# Altium PCB turnRacingMain.PcbDoc (part 1 of 2)
Units mil, origin at the board's own origin, x right, y up, seen from the top; angles counter-clockwise.
Board outline 9596.84 x 4626.79 mil, 2 copper layers (Component Side, Bottom Layer), stack 12.8 mil thick; 110 components, 131 nets, 424 pads, 166 vias.
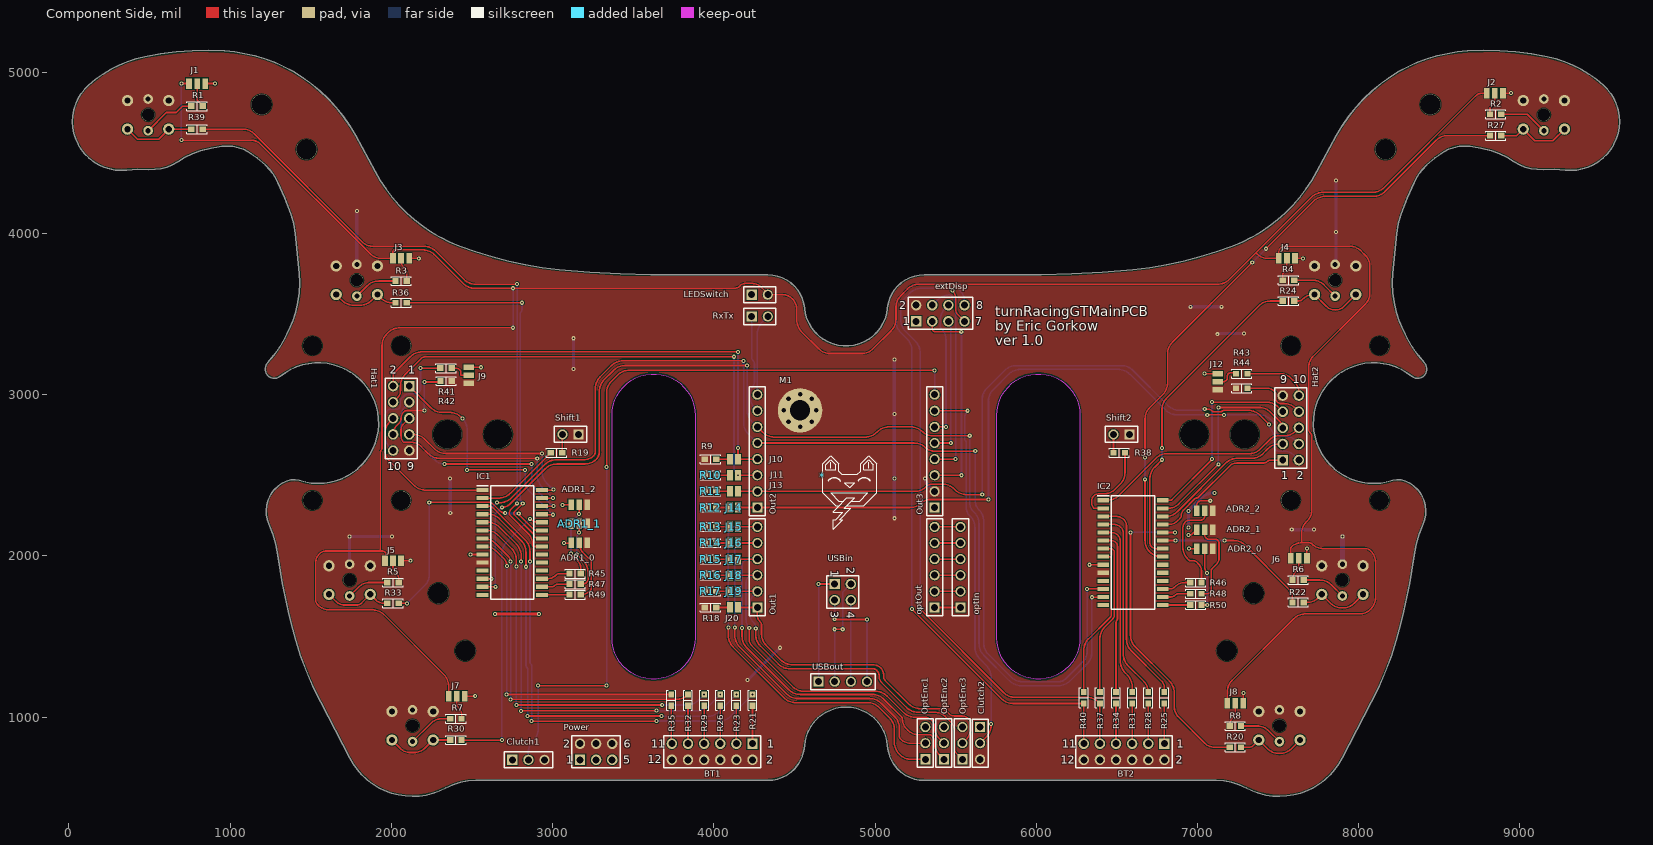
[diagram p0: Component Side view]
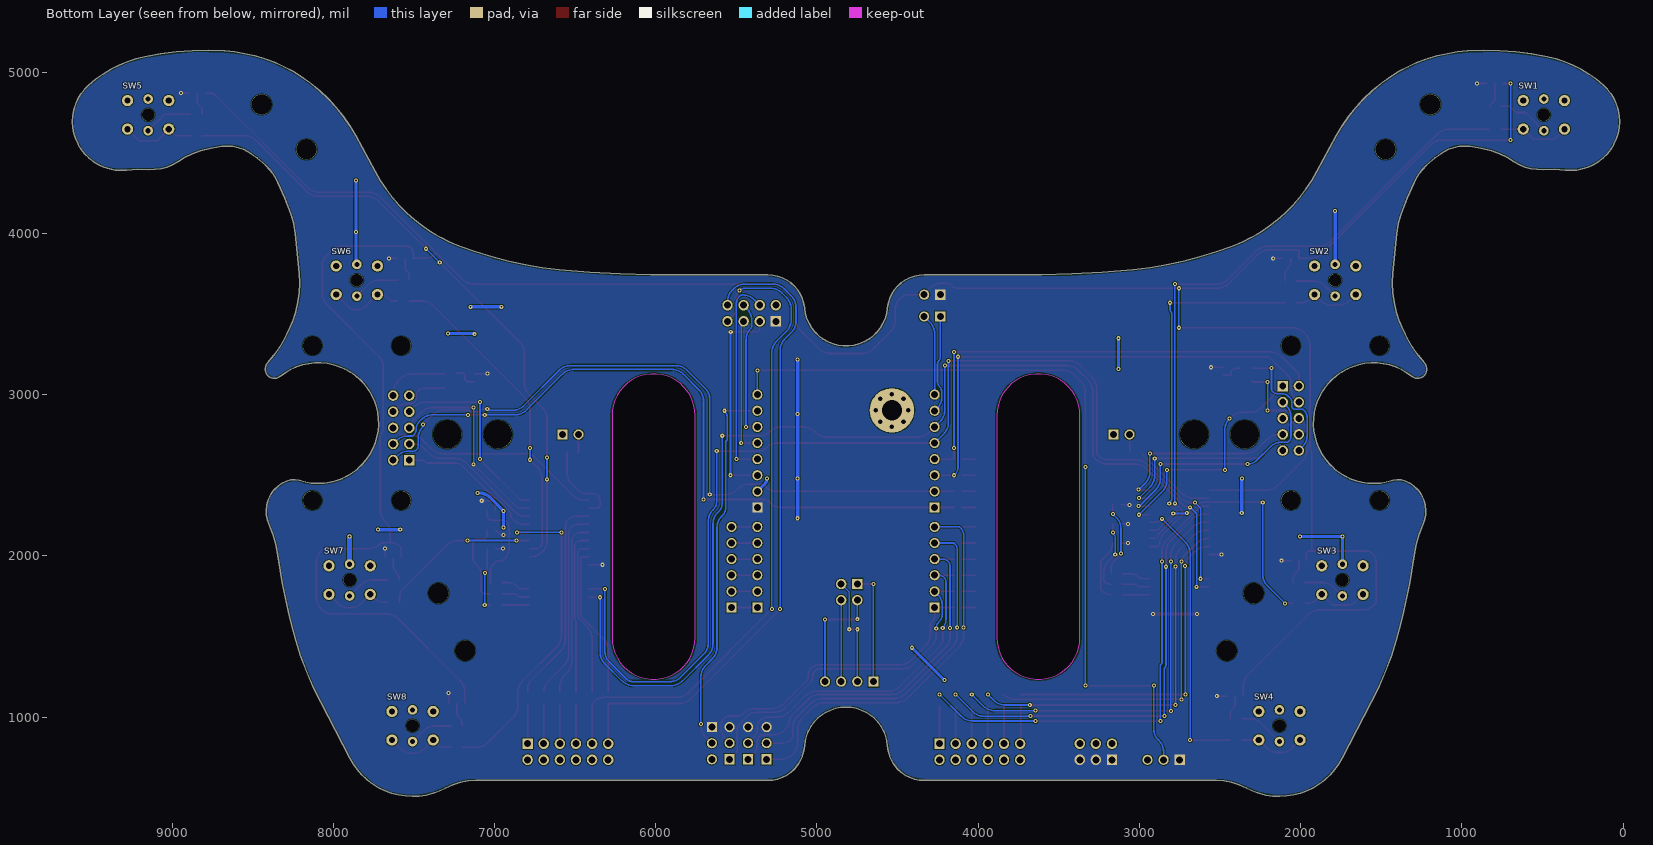
[diagram p1: Bottom Layer view, seen from below]
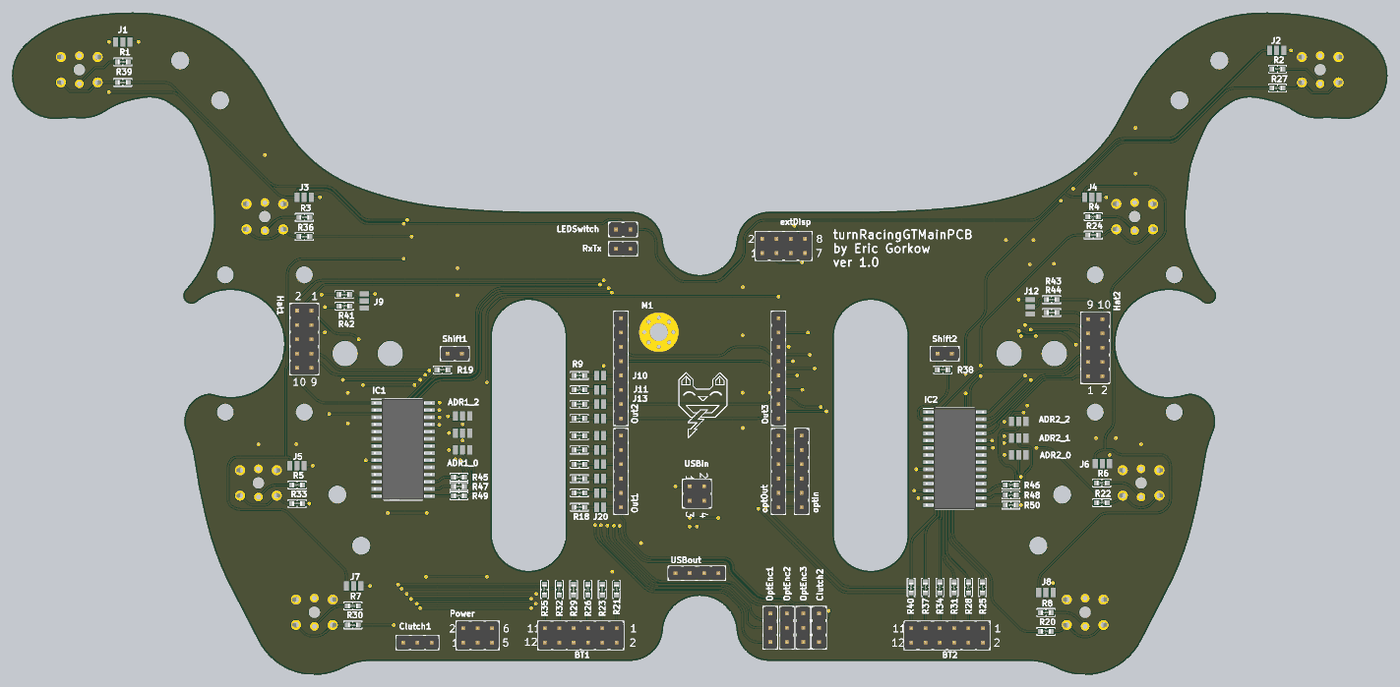
[diagram p3: 3D render of the assembled board from above, using the file's embedded part models]
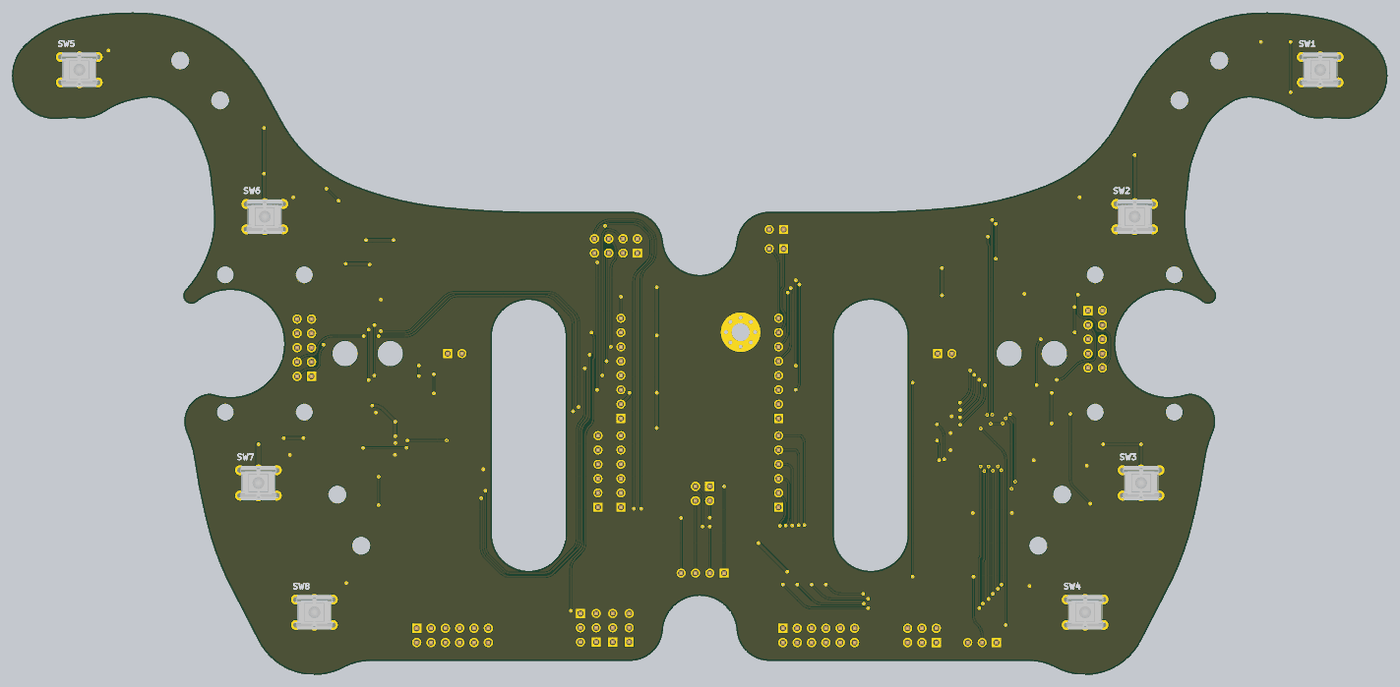
[diagram p4: 3D render of the assembled board from below, using the file's embedded part models]

## Layer stack, top to bottom
Top Solder: solder mask 0.4, Solder Resist, Dk 3.5
Component Side: signal copper 1.4
Dielectric 1: core 10, FR-4, Dk 4.2
Bottom Layer: signal copper 1.4
Solder Side: solder mask 0.4, Solder Resist, Dk 3.5

## Board outline
508 vertices, not listed, extent 21.58,508.43 9618.42,5135.22
cut-out: 3368.79,2870.69 3370.82,2903.01 3376.89,2934.82 3386.89,2965.62 3400.68,2994.92 3418.03,3022.26 3438.68,3047.22 3462.28,3069.38 3488.48,3088.42 3516.86,3104.02 3546.97,3115.94 3578.34,3123.99 3610.47,3128.05 3642.85,3128.05 3674.98,3123.99 3706.35,3115.94 3736.46,3104.02 3764.83,3088.42 3791.03,3069.38 3814.64,3047.22 3835.28,3022.26 3852.64,2994.92 3866.42,2965.62 3876.43,2934.82 3882.5,2903.01 3884.53,2870.69 3884.53,1492.74 3882.5,1460.42 3876.43,1428.61 3866.42,1397.81 3852.64,1368.5 3835.28,1341.16 3814.64,1316.21 3791.03,1294.04 3764.83,1275.01 3736.46,1259.4 3706.35,1247.48 3674.98,1239.43 3642.85,1235.37 3610.47,1235.37 3578.34,1239.43 3546.97,1247.48 3516.86,1259.4 3488.48,1275.01 3462.28,1294.04 3438.68,1316.21 3418.03,1341.16 3400.68,1368.5 3386.89,1397.81 3376.89,1428.61 3370.82,1460.42 3368.79,1492.74
cut-out: 6271.22,1492.74 6269.18,1460.42 6263.12,1428.61 6253.11,1397.81 6239.32,1368.5 6221.97,1341.16 6201.33,1316.21 6177.72,1294.04 6151.52,1275.01 6123.14,1259.4 6093.03,1247.48 6061.66,1239.43 6029.54,1235.37 5997.15,1235.37 5965.02,1239.43 5933.66,1247.48 5903.55,1259.4 5875.17,1275.01 5848.97,1294.04 5825.36,1316.21 5804.72,1341.16 5787.37,1368.5 5773.58,1397.81 5763.57,1428.61 5757.5,1460.42 5755.47,1492.74 5755.47,2870.69 5757.5,2903.01 5763.57,2934.82 5773.58,2965.62 5787.37,2994.92 5804.72,3022.26 5825.36,3047.22 5848.97,3069.38 5875.17,3088.42 5903.55,3104.02 5933.66,3115.94 5965.02,3123.99 5997.15,3128.05 6029.54,3128.05 6061.66,3123.99 6093.03,3115.94 6123.14,3104.02 6151.52,3088.42 6177.72,3069.38 6201.33,3047.22 6221.97,3022.26 6239.32,2994.92 6253.11,2965.62 6263.12,2934.82 6269.18,2903.01 6271.22,2870.69

## Design rules (kind name [scope] priority, off if disabled: settings)
AcuteAngle [All] p1: minimum=4.50000000000000E+0001 checktracksonly=FALSE
BoardOutlineClearance [All] p1: gap=10 ignorepadtopadclearanceinfootprint=FALSE
Clearance [All] p1: gap=5 ignorepadtopadclearanceinfootprint=FALSE
ComponentClearance [All] p1: gap=3.94 collisioncheckmode=3 verticalgap=10 showdistances=FALSE
DiffPairsRouting [All] p1: maxlimit=10 minlimit=3.94 mostfreqgap=10 toplayer_minwidth=11.81 toplayer_maxwidth=15 toplayer_prefwidth=15 bottomlayer_minwidth=11.81 bottomlayer_maxwidth=15 bottomlayer_prefwidth=15 maxuncoupledlength=500
FanoutControl Fanout_Small [All] p1 off: bgadir=Out bgaviamode=Centered fanoutstyle=Auto fanoutdirection=Alternating viagrid=1 // Protel DXP Scope 1 Expression Was: (CompPinCount < 5)   Fanout_Small (Default Rule)
FanoutControl Fanout_Default [All] p2: bgadir=Out bgaviamode=Centered fanoutstyle=Auto fanoutdirection=Alternating viagrid=1 // Fanout_Default (Default Rule)
FanoutControl Fanout_SOIC [All] p3 off: bgadir=Out bgaviamode=Centered fanoutstyle=Auto fanoutdirection=Alternating viagrid=1 // Protel DXP Scope 1 Expression Was: IsSOIC   Fanout_SOIC (Default Rule)
FanoutControl Fanout_BGA [All] p4 off: bgadir=Out bgaviamode=Centered fanoutstyle=Auto fanoutdirection=Alternating viagrid=1 // Protel DXP Scope 1 Expression Was: IsBGA   Fanout_BGA (Default Rule)
FanoutControl Fanout_LCC [All] p5 off: bgadir=Out bgaviamode=Centered fanoutstyle=Auto fanoutdirection=Alternating viagrid=1 // Protel DXP Scope 1 Expression Was: IsLCC   Fanout_LCC (Default Rule)
HoleSize [All] p1: absolutevalues=TRUE maxlimit=275.59 minlimit=7.87 maxpercent=80.000 minpercent=20.000
MinimumAnnularRing [All] p1: minimumring=2.99
MinimumSolderMaskSliver [All] p1: minsoldermaskwidth=7.87
PolygonConnect [All] p1: connectstyle=Direct reliefconductorwidth=10 reliefentries=4 polygonreliefangle="90 Angle" airgapwidth=10
RoutingVias [All] p1: holewidth=11.81 width=25.2 viastyle="Through Hole" minholewidth=11.81 minwidth=24 maxholewidth=28 maxwidth=50
SMDEntry [All] p1 off: side=TRUE corner=TRUE anyangle=FALSE // Protel DXP Scope 1 Expression Was: not IsRoundPad
SMDToCorner [All] p1: distance=60000
SilkToSolderMaskClearance [All] p1 off: minsilkscreentomaskgap=10 clearancetoexposedcopper=TRUE // Protel DXP Scope 1 Expression Was: IsPad
SolderMaskExpansion ViaTenting [IsVia] p1: expansion=-393.7
SolderMaskExpansion [All] p2: expansion=0
Width [All] p1: maxlimit=118.11 minlimit=6 preferedwidth=12
20 further rules are at their usual default settings.

## Classes and differential pairs
component class turnRacingMainInput: BT1 BT2 Clutch1 Clutch2 Hat1 Hat2 J1 J2 J3 J4 J5 J6 J7 J8 J9 J10 J11 J12 J13 J14 J15 J16 J17 J18 J19 J20 OptEnc1 OptEnc2 OptEnc3 R1 R2 R3 R4 R5 R6 R7 R8 R9 R10 R11 R12 R13 R14 R15 R16 R17 R18 R41 R42 R43 R44 Shift1 Shift2 SW1 SW2 SW3 SW4 SW5 SW6 SW7 SW8
component class turnRacingMain: * ADR1_0 ADR1_1 ADR1_2 ADR2_0 ADR2_1 ADR2_2 extDisp F1 IC1 IC2 LEDSwitch M1 optIn optOut Out1 Out2 Out3 Power R19 R20 R21 R22 R23 R24 R25 R26 R27 R28 R29 R30 R31 R32 R33 R34 R35 R36 R37 R38 R39 R40 R45 R46 R47 R48 R49 R50 RxTx USBin USBout Y1

## Components (designator, comment, footprint, x,y, rotation, side; value= is the part's Value field where it differs from the comment)
* "Signature" Signature 4675,2490 r0 top
ADR1_0 "JUMPERID" SMD-JUMPER-3 3165,2080.63 r180 top net-tie
ADR1_1 "JUMPERID" SMD-JUMPER-3 3165,2198.51 r180 top net-tie
ADR1_2 "JUMPERID" SMD-JUMPER-3 3165,2316.4 r180 top net-tie
ADR2_0 "JUMPERID" SMD-JUMPER-3 7045,2045 r180 top net-tie
ADR2_1 "JUMPERID" SMD-JUMPER-3 7045,2162.88 r180 top net-tie
ADR2_2 "JUMPERID" SMD-JUMPER-3 7045,2280.77 r180 top net-tie
BT1 "61301221121" 61301221121 3990,785 r180 top locked
BT2 "61301221121" 61301221121 6545,785 r180 top
Clutch1 "61300311121" 61300311121 2850,735 r0 top
Clutch2 "61300311121" 61300311121 5652.12,837.99 r270 top
extDisp "61300821121" 61300821121 5405,3505 r0 top
Hat1 "61301021121" 61301021121 2060.89,2853.29 r270 top locked
Hat2 "61301021121" 61301021121 7579.11,2794.21 r90 top locked
IC1 "MCP23017-E_SO" SOIC127P1030X265-28N 2750,2083.19 r0 top
IC2 "MCP23017-E_SO" SOIC127P1030X265-28N 6600,2020 r0 top
J1 "JUMPERID" SMD-JUMPER-3 795,4930 r0 top net-tie
J2 "JUMPERID" SMD-JUMPER-3 8845,4870 r0 top net-tie
J3 "JUMPERID" SMD-JUMPER-3 2060,3845 r0 top net-tie
J4 "JUMPERID" SMD-JUMPER-3 7555,3845 r0 top net-tie
J5 "JUMPERID" SMD-JUMPER-3 2010,1970 r0 top net-tie
J6 "JUMPERID" SMD-JUMPER-3 7629.11,1985 r0 top net-tie
J7 "JUMPERID" SMD-JUMPER-3 2405,1130 r0 top net-tie
J8 "JUMPERID" SMD-JUMPER-3 7235,1085 r0 top net-tie
J9 "JUMPERID" SMD-JUMPER-3 2480,3120 r90 top net-tie
J10 "SMD Jumper open" SMD-JUMPER-OPEN 4125,2600 r180 top
J11 "SMD Jumper open" SMD-JUMPER-OPEN 4125,2500 r180 top
J12 "JUMPERID" SMD-JUMPER-3 7125,3080 r90 top net-tie
J13 "SMD Jumper open" SMD-JUMPER-OPEN 4125,2400 r180 top
J14 "SMD Jumper open" SMD-JUMPER-OPEN 4125,2300 r180 top
J15 "SMD Jumper open" SMD-JUMPER-OPEN 4125,2180 r180 top
J16 "SMD Jumper open" SMD-JUMPER-OPEN 4125,2080 r180 top
J17 "SMD Jumper open" SMD-JUMPER-OPEN 4125,1980 r180 top
J18 "SMD Jumper open" SMD-JUMPER-OPEN 4125,1880 r180 top
J19 "SMD Jumper open" SMD-JUMPER-OPEN 4125,1780 r180 top
J20 "SMD Jumper open" SMD-JUMPER-OPEN 4125,1680 r180 top
LEDSwitch "61300211121" 61300211121 4285,3620 r0 top
M1 "mounting pad" MOUNTING_PAD_M3 4535,2902.52 r0 top
OptEnc1 "61300311121" 61300311121 5312.12,838.21 r90 top
OptEnc2 "61300311121" 61300311121 5427.12,838.21 r90 top
OptEnc3 "61300311121" 61300311121 5542.12,838.21 r90 top
optIn "61300611121" 61300611121 5530,1930 r90 top
optOut "61300611121" 61300611121 5370,1930 r90 top
Out1 "61300611121" 61300611121 4270,1930 r90 top
Out2 "61300811121" 61300811121 4270,2650 r90 top
Out3 "61300811121" 61300811121 5370,2650 r90 top
Power "61300621121" 61300621121 3270,785 r0 top
R1 "SMD Resistor" "STACKPOLE CSR0603" 795,4790 r180 top value=330
R2 "SMD Resistor" "STACKPOLE CSR0603" 8850,4740 r0 top value=330
R3 "SMD Resistor" "STACKPOLE CSR0603" 2060.89,3705 r180 top value=330
R4 "SMD Resistor" "STACKPOLE CSR0603" 7565,3710 r0 top value=330
R5 "SMD Resistor" "STACKPOLE CSR0603" 2010.89,1835 r180 top value=330
R6 "SMD Resistor" "STACKPOLE CSR0603" 7625,1850 r0 top value=330
R7 "SMD Resistor" "STACKPOLE CSR0603" 2400,990 r180 top value=330
R8 "SMD Resistor" "STACKPOLE CSR0603" 7235,945 r0 top value=330
R9 "SMD Resistor" "STACKPOLE CSR0603" 3980,2600 r180 top value=10k
R10 "SMD Resistor" "STACKPOLE CSR0603" 3980,2500 r180 top value=10k
R11 "SMD Resistor" "STACKPOLE CSR0603" 3980,2400 r180 top value=10k
R12 "SMD Resistor" "STACKPOLE CSR0603" 3980,2300 r180 top value=10k
R13 "SMD Resistor" "STACKPOLE CSR0603" 3980,2180 r180 top value=10k
R14 "SMD Resistor" "STACKPOLE CSR0603" 3980,2080 r180 top value=10k
R15 "SMD Resistor" "STACKPOLE CSR0603" 3980,1980 r180 top value=10k
R16 "SMD Resistor" "STACKPOLE CSR0603" 3980,1880 r180 top value=10k
R17 "SMD Resistor" "STACKPOLE CSR0603" 3980,1780 r180 top value=10k
R18 "SMD Resistor" "STACKPOLE CSR0603" 3980,1680 r180 top value=10k
R19 "SMD Resistor" "STACKPOLE CSR0603" 3025,2640 r0 top value=4k7
R20 "SMD Resistor" "STACKPOLE CSR0603" 7235,812.93 r180 top value=4k7
R21 "SMD Resistor" "STACKPOLE CSR0603" 4240,1105 r270 top locked value=4k7
R22 "SMD Resistor" "STACKPOLE CSR0603" 7625,1711.17 r180 top value=4k7
R23 "SMD Resistor" "STACKPOLE CSR0603" 4140,1105 r270 top locked value=4k7
R24 "SMD Resistor" "STACKPOLE CSR0603" 7565,3580.95 r180 top value=4k7
R25 "SMD Resistor" "STACKPOLE CSR0603" 6793.54,1120 r270 top value=4k7
R26 "SMD Resistor" "STACKPOLE CSR0603" 4040,1105 r270 top locked value=4k7
R27 "SMD Resistor" "STACKPOLE CSR0603" 8850,4607.06 r180 top value=4k7
R28 "SMD Resistor" "STACKPOLE CSR0603" 6695,1120 r270 top value=4k7
R29 "SMD Resistor" "STACKPOLE CSR0603" 3940,1105 r270 top locked value=4k7
R30 "SMD Resistor" "STACKPOLE CSR0603" 2400,857.93 r0 top value=4k7
R31 "SMD Resistor" "STACKPOLE CSR0603" 6595,1120 r270 top value=4k7
R32 "SMD Resistor" "STACKPOLE CSR0603" 3840,1105 r270 top value=4k7
R33 "SMD Resistor" "STACKPOLE CSR0603" 2010.89,1706.17 r0 top value=4k7
R34 "SMD Resistor" "STACKPOLE CSR0603" 6495,1120 r270 top value=4k7
R35 "SMD Resistor" "STACKPOLE CSR0603" 3736.46,1105 r270 top locked value=4k7
R36 "SMD Resistor" "STACKPOLE CSR0603" 2060.89,3570 r0 top value=4k7
R37 "SMD Resistor" "STACKPOLE CSR0603" 6395,1120 r270 top value=4k7
R38 "SMD Resistor" "STACKPOLE CSR0603" 6515,2640 r180 top locked value=4k7
R39 "SMD Resistor" "STACKPOLE CSR0603" 795,4647.06 r0 top value=4k7
R40 "SMD Resistor" "STACKPOLE CSR0603" 6295,1120 r270 top value=4k7
R41 "SMD Resistor" "STACKPOLE CSR0603" 2339.57,3165 r0 top value=4k7
R42 "SMD Resistor" "STACKPOLE CSR0603" 2340,3085 r180 top value=4k7
R43 "SMD Resistor" "STACKPOLE CSR0603" 7275,3130 r180 top value=4k7
R44 "SMD Resistor" "STACKPOLE CSR0603" 7275,3040 r0 top value=4k7
R45 "SMD Resistor" "STACKPOLE CSR0603" 3140,1890 r180 top value=4k7
R46 "SMD Resistor" "STACKPOLE CSR0603" 6990,1835 r180 top value=4k7
R47 "SMD Resistor" "STACKPOLE CSR0603" 3140,1825 r180 top value=4k7
R48 "SMD Resistor" "STACKPOLE CSR0603" 6990,1765 r180 top value=4k7
R49 "SMD Resistor" "STACKPOLE CSR0603" 3140,1760 r180 top value=4k7
R50 "SMD Resistor" "STACKPOLE CSR0603" 6990,1695 r180 top value=4k7
RxTx "61300211121" 61300211121 4285,3485 r0 top
Shift1 "61300211121" 61300211121 3111.03,2753.32 r180 top locked
Shift2 "61300211121" 61300211121 6528.97,2753.32 r180 top locked
SW1 "FSMIJ" FSMIJ 491.26,4735.65 r180 bottom locked
SW2 "FSMIJ" FSMIJ 1785.59,3709.54 r180 bottom locked
SW3 "FSMIJ" FSMIJ 1740.89,1849.75 r180 bottom locked
SW4 "FSMIJ" FSMIJ 2131.36,946.51 r180 bottom locked
SW5 "FSMIJ" FSMIJ 9148.75,4735.65 r180 bottom locked
SW6 "FSMIJ" FSMIJ 7854.41,3709.54 r180 bottom locked
SW7 "FSMIJ" FSMIJ 7899.11,1849.75 r180 bottom locked
SW8 "FSMIJ" FSMIJ 7508.65,946.51 r180 bottom locked
USBin "61300421121" 61300421121 4799.93,1775.43 r270 top
USBout "61300411121" 61300411121 4800,1220 r0 top

## Footprints (in the part's own frame and the unit in brackets; to place one, negate y for a bottom-side part, rotate by r counter-clockwise, add the part's x,y. Pads: shape width x height; smd on the part's side, far side on the other; paste and mask are expansions set on the pad)
61300211121 [mm] "2 pins, 1 row, straight, gold plating"
  rect 1.6x1.6 hole 1.1: 1(-1.27,0)
  round 1.6 hole 1.1: 2(1.27,0)
  silkscreen extent -2.54,-1.27 2.54,1.27, body extent -2.54,-1.27 2.54,1.27, height 8.57
61300311121 [mm] "3 pins, 1 row, straight, gold plating"
  rect 1.6x1.6 hole 1.1: 1(-2.54,0)
  round 1.6 hole 1.1: 2(0,0) 3(2.54,0)
  silkscreen extent -3.81,-1.27 3.81,1.27, body extent -3.81,-1.27 3.81,1.27, height 8.57
61300411121 [mm] "4 pins, 1 row, straight, gold plating"
  rect 1.6x1.6 hole 1.1: 1(-3.81,0)
  round 1.6 hole 1.1: 2(-1.27,0) 3(1.27,0) 4(3.81,0)
  silkscreen extent -5.08,-1.27 5.08,1.27, body extent -5.08,-1.27 5.08,1.27, height 8.57
61300421121 [mm] "2.54 mm THT Dual Pin Header, 4p"
  rect 1.65x1.65 hole 1.1: 1(-1.27,-1.27)
  round 1.65 hole 1.1: 2(-1.27,1.27) 3(1.27,-1.27) 4(1.27,1.27)
  silkscreen extent -2.54,-2.54 2.54,2.54, body extent -2.54,-2.54 2.54,2.54, height 8.59
61300611121 [mm] "6 pins, 1 row, straight, gold plating"
  rect 1.6x1.6 hole 1.1: 1(-6.35,0)
  round 1.6 hole 1.1: 2(-3.81,0) 3(-1.27,0) 4(1.27,0) 5(3.81,0) 6(6.35,0)
  silkscreen extent -7.62,-1.27 7.62,1.27, body extent -7.62,-1.27 7.62,1.27, height 8.57
61300621121 [mm] "2.54 mm THT Dual Pin Header, 6p"
  rect 1.65x1.65 hole 1.1: 1(-2.54,-1.27)
  round 1.65 hole 1.1: 2(-2.54,1.27) 3(0,-1.27) 4(0,1.27) 5(2.54,-1.27) 6(2.54,1.27)
  silkscreen extent -3.81,-2.54 3.81,2.54, body extent -3.81,-2.54 3.81,2.54, height 8.59
61300811121 [mm] "8 pins, 1 row, straight, gold plating"
  rect 1.6x1.6 hole 1.1: 1(-8.89,0)
  round 1.6 hole 1.1: 2(-6.35,0) 3(-3.81,0) 4(-1.27,0) 5(1.27,0) 6(3.81,0) 7(6.35,0) 8(8.89,0)
  silkscreen extent -10.16,-1.27 10.16,1.27, body extent -10.16,-1.27 10.16,1.27, height 8.57
61300821121 [mm] "2.54 mm THT Dual Pin Header, 8p"
  rect 1.65x1.65 hole 1.1: 1(-3.81,-1.27)
  round 1.65 hole 1.1: 2(-3.81,1.27) 3(-1.27,-1.27) 4(-1.27,1.27) 5(1.27,-1.27) 6(1.27,1.27) 7(3.81,-1.27) 8(3.81,1.27)
  silkscreen extent -5.08,-2.54 5.08,2.54, body extent -5.08,-2.54 5.08,2.54, height 8.59
61301021121 [mm] "2.54 mm THT Dual Pin Header, 10p"
  rect 1.65x1.65 hole 1.1: 1(-5.08,1.27)
  round 1.65 hole 1.1: 2(-5.08,-1.27) 3(-2.54,1.27) 4(-2.54,-1.27) 5(0,1.27) 6(0,-1.27) 7(2.54,1.27) 8(2.54,-1.27) 9(5.08,1.27) 10(5.08,-1.27)
  silkscreen extent -6.35,-2.54 6.35,2.54, body extent -6.35,-2.54 6.35,2.54, height 5.59
61301221121 [mm] "2.54 mm THT Dual Pin Header, 12p"
  rect 1.65x1.65 hole 1.1: 1(-6.35,-1.27)
  round 1.65 hole 1.1: 2(-6.35,1.27) 3(-3.81,-1.27) 4(-3.81,1.27) 5(-1.27,-1.27) 6(-1.27,1.27) 7(1.27,-1.27) 8(1.27,1.27) 9(3.81,-1.27) 10(3.81,1.27) 11(6.35,-1.27) 12(6.35,1.27)
  silkscreen extent -7.62,-2.54 7.62,2.54, body extent -7.62,-2.54 7.62,2.54, height 8.59
FSMIJ [mil]
  round 70 / inner rect 50x100 / far side round 70 hole 39.37: 1(-127.95,88.58) 2(127.95,88.58) 3(-127.95,-88.58) 4(127.95,-88.58)
  round 60 / inner rect 50x100 / far side round 60 hole 31.5: 5(0,-98.43) 6(0,98.43)
  body extent -153,-120 153,120, height 276
MOUNTING_PAD_M3 [mm] "M3 mounting pad"
  round 7 hole 3.2: 1(0,0)
Signature [mil]
  silkscreen extent 0,-325 335,130
SMD-JUMPER-3 [mm] "Jumper, SMD"
  rect 0.9x1.65 smd: 1(-1.27,0) 2(0,0) 3(1.27,0)
SMD-JUMPER-OPEN [mm] "Jumper, SMD"
  rect 0.9x1.65 smd: 1(-0.635,0) 2(0.635,0)
SOIC127P1030X265-28N [mm]
  rect 1.85x0.65 smd: 1(-4.675,8.255) 2(-4.675,6.985) 3(-4.675,5.715) 4(-4.675,4.445) 5(-4.675,3.175) 6(-4.675,1.905) 7(-4.675,0.635) 8(-4.675,-0.635) 9(-4.675,-1.905) 10(-4.675,-3.175) 11(-4.675,-4.445) 12(-4.675,-5.715) 13(-4.675,-6.985) 14(-4.675,-8.255) 15(4.675,-8.255) 16(4.675,-6.985) 17(4.675,-5.715) 18(4.675,-4.445) 19(4.675,-3.175) 20(4.675,-1.905) 21(4.675,-0.635) 22(4.675,0.635) 23(4.675,1.905) 24(4.675,3.175) 25(4.675,4.445) 26(4.675,5.715) 27(4.675,6.985) 28(4.675,8.255)
  silkscreen extent -5.6,-8.95 3.4,8.95, body extent -5.15,-8.95 5.15,8.95, height 2.65
"STACKPOLE CSR0603" [mm] "Chip Resistor, 2-Leads, Body 1.60x0.80mm, IPC Medium Density"
  rect 1x0.9 smd: 1(-0.9,0) 2(0.9,0)
  silkscreen extent -1.6,-0.7 1.6,0.7, body extent -0.85,-0.4 0.85,0.4, height 0.45

## Part data
ADR1_0 ADR1_1 ADR1_2 ADR2_0 ADR2_1 ADR2_2 J1 J2 J3 J4 J5 J6 J7 J8 J9 J12: library part "SMD Jumper 3"
BT1 BT2: "WR-PHD 2.54 mm THT Dual Pin Header, 12p", Rated Current="3 A", Withstanding Voltage="500 VAC", Working Voltage="250 VAC", ComponentLink1Description=Manufacturer, ComponentLink1URL=http://www.we-online.de, ComponentLink2Description=Datasheet, ComponentLink2URL=http://katalog.we-online.de/em/datasheet/6130xx21121.pdf, Part Number=61301221121, Pin Number=12, Pitch="2.54 mm", Published Date="Aug 2017", Publisher="Wurth Elektronik"
Clutch1 Clutch2 OptEnc1 OptEnc2 OptEnc3: "WR-PHD 2.54 mm THT Pin Header, 3p", Rated Current="3 A", Withstanding Voltage="500 VAC", Working Voltage="250 VAC", ComponentLink1Description=Manufacturer, ComponentLink1URL=http://www.we-online.de, ComponentLink2Description=Datasheet, ComponentLink2URL=http://katalog.we-online.de/em/datasheet/6130xx11121.pdf, Part Number=61300311121, Pin Number=3, Pitch="2.54 mm", Published Date="Aug 2017", Publisher="Wurth Elektronik"
extDisp: "WR-PHD 2.54 mm THT Dual Pin Header, 8p", Rated Current="3 A", Withstanding Voltage="500 VAC", Working Voltage="250 VAC", ComponentLink1Description=Manufacturer, ComponentLink1URL=http://www.we-online.de, ComponentLink2Description=Datasheet, ComponentLink2URL=http://katalog.we-online.de/em/datasheet/6130xx21121.pdf, Part Number=61300821121, Pin Number=8, Pitch="2.54 mm", Published Date="Aug 2017", Publisher="Wurth Elektronik"
Hat1 Hat2: "WR-PHD 2.54 mm THT Dual Pin Header, 10p", Rated Current="3 A", Withstanding Voltage="500 VAC", Working Voltage="250 VAC", ComponentLink1Description=Manufacturer, ComponentLink1URL=http://www.we-online.de, ComponentLink2Description=Datasheet, ComponentLink2URL=http://katalog.we-online.de/em/datasheet/6130xx21121.pdf, Part Number=61301021121, Pin Number=10, Pitch="2.54 mm", Published Date="Aug 2017", Publisher="Wurth Elektronik"
IC1 IC2: "Integrated Circuit", Manufacturer_Name=Microchip, Manufacturer_Part_Number=MCP23017-E/SO, Height=2.65mm
LEDSwitch RxTx Shift1 Shift2: "WR-PHD 2.54 mm THT Pin Header, 2p", Rated Current="3 A", Withstanding Voltage="500 VAC", Working Voltage="250 VAC", ComponentLink1Description=Manufacturer, ComponentLink1URL=http://www.we-online.de, ComponentLink2Description=Datasheet, ComponentLink2URL=http://katalog.we-online.de/em/datasheet/6130xx11121.pdf, Part Number=61300211121, Pin Number=2, Pitch="2.54 mm", Published Date="Aug 2017", Publisher="Wurth Elektronik"
optIn optOut Out1: "WR-PHD 2.54 mm THT Pin Header, 6p", Rated Current="3 A", Withstanding Voltage="500 VAC", Working Voltage="250 VAC", ComponentLink1Description=Manufacturer, ComponentLink1URL=http://www.we-online.de, ComponentLink2Description=Datasheet, ComponentLink2URL=http://katalog.we-online.de/em/datasheet/6130xx11121.pdf, Part Number=61300611121, Pin Number=6, Pitch="2.54 mm", Published Date="Aug 2017", Publisher="Wurth Elektronik"
Out2 Out3: "WR-PHD 2.54 mm THT Pin Header, 8p", Rated Current="3 A", Withstanding Voltage="500 VAC", Working Voltage="250 VAC", ComponentLink1Description=Manufacturer, ComponentLink1URL=http://www.we-online.de, ComponentLink2Description=Datasheet, ComponentLink2URL=http://katalog.we-online.de/em/datasheet/6130xx11121.pdf, Part Number=61300811121, Pin Number=8, Pitch="2.54 mm", Published Date="Aug 2017", Publisher="Wurth Elektronik"
Power: "WR-PHD 2.54 mm THT Dual Pin Header, 6p", Rated Current="3 A", Withstanding Voltage="500 VAC", Working Voltage="250 VAC", ComponentLink1Description=Manufacturer, ComponentLink1URL=http://www.we-online.de, ComponentLink2Description=Datasheet, ComponentLink2URL=http://katalog.we-online.de/em/datasheet/6130xx21121.pdf, Part Number=61300621121, Pin Number=6, Pitch="2.54 mm", Published Date="Aug 2017", Publisher="Wurth Elektronik"
R1 R2 R3 R4 R5 R6 R7 R8 R9 R10 R11 R12 R13 R14 R15 R16 R17 R18 R19 R20 R21 R22 R23 R24 R25 R26 R27 R28 R29 R30 R31 R32 R33 R34 R35 R36 R37 R38 R39 R40 R41 R42 R43 R44 R45 R46 R47 R48 R49 R50: "Resistor with multiple footprints"
USBin: "WR-PHD 2.54 mm THT Dual Pin Header, 4p", Rated Current="3 A", Withstanding Voltage="500 VAC", Working Voltage="250 VAC", ComponentLink1Description=Manufacturer, ComponentLink1URL=http://www.we-online.de, ComponentLink2Description=Datasheet, ComponentLink2URL=http://katalog.we-online.de/em/datasheet/6130xx21121.pdf, Part Number=61300421121, Pin Number=4, Pitch="2.54 mm", Published Date="Aug 2017", Publisher="Wurth Elektronik"
USBout: "WR-PHD 2.54 mm THT Pin Header, 4p", Rated Current="3 A", Withstanding Voltage="500 VAC", Working Voltage="250 VAC", ComponentLink1Description=Manufacturer, ComponentLink1URL=http://www.we-online.de, ComponentLink2Description=Datasheet, ComponentLink2URL=http://katalog.we-online.de/em/datasheet/6130xx11121.pdf, Part Number=61300411121, Pin Number=4, Pitch="2.54 mm", Published Date="Aug 2017", Publisher="Wurth Elektronik"

## Free pads (board coordinates)
  round 78.74 hole 78.74: 1(491.26,4735.65) 1(1740.89,1849.75) 1(1785.59,3709.54) 1(2131.36,946.51) 1(7508.65,946.51) 1(7854.41,3709.54) 1(7899.11,1849.75) 1(9148.75,4735.65)
  round 125.98 hole 125.98: 1(1195.16,4799.96) 1(1473.54,4521.57) 1(2291.41,1768.15) 1(2457.8,1411.34) 1(7182.21,1411.34) 1(7348.59,1768.15) 1(8166.46,4521.57) 1(8444.85,4799.96)
  round 118.11 hole 118.11: 1(1509.71,2344.21) 1(1509.71,3303.29) 1(2060.89,2344.21) 1(2060.89,3303.29) 1(7579.12,2344.21) 1(7579.12,3303.29) 1(8130.3,2344.21) 1(8130.3,3303.29)
  round 177.17 hole 177.17: 1(2346.07,2753.32) 1(2661.03,2753.32) 1(6978.97,2753.32) 1(7293.93,2753.32)

## Via types
v1: diameter 25.2, hole 11.81, Component Side to Bottom Layer, 158 vias
v2: diameter 50, hole 28, Component Side to Bottom Layer, 8 vias

## Nets (pads, with @x,y where several pads share a name; then routed paths per layer and width w, separated by ;. In a path a pad name is that pad's centre, name@x,y a point inside that pad or via, vN(x,y) a via of type N, cw(c..) or ccw(c..) an arc to the next point about the centre after c; other vN are vias at no path point)
5V: ADR1_0.3 ADR1_1.3 ADR1_2.3 ADR2_0.3 ADR2_1.3 ADR2_2.3 Clutch1.1 Clutch2.1 extDisp.1 IC1.9 IC2.9 J1.3 J2.3 J3.3 J4.3 J5.3 J6.3 J7.3 J8.3 J9.3 J12.3 LEDSwitch.1 OptEnc1.3 OptEnc2.3 OptEnc3.3 Out3.1 Power.1 Power.3 Power.5 | length 1471.4
  Component Side w10: J1.3@845,4930 850,4935 854.76,4930.24 v1(905,4930.24) ; J5.3@2060,1970 v1(2119.77,1970) ; J3.3@2110,3845 2169.67,3845 v1(2170,3844.67) ; J7.3@2455,1130 v1(2520,1130) ; J9.3@2480,3170 v1(2555,3170) ; v1(2490,2008.19) IC1.9@2565.94,2008.19 ; v1(3062.48,2315.07) 3062.48,2316.4 ADR1_2.3@3115,2316.4 ; v1@3065.76,2198.51 v1(3070.12,2198.51) ADR1_1.3@3115,2198.51 ; v1(3069.92,2078.9) 3111.83,2078.9 ccw(c3111.83,2082.37) 3114.28,2079.91 ADR1_0.3@3115,2080.63 ; v1(6330,1945) IC2.9@6415.94,1945 ; v1(6943.81,2128.42) 6945,2128.42 ccw(c6945,2165.94) 6971.52,2139.41 ADR2_1.3@6995,2162.88 ; v1(6946.38,2045.57) 6950,2045.57 ccw(c6951.38,2046.96) 6951.38,2045 ADR2_0.3@6995,2045 ; ADR2_2.3@6995,2280.77 6995,2309.58 cw(c7030.27,2309.58) 7005.33,2334.52 cw(c7023.07,2316.78) 7023.07,2341.87 v1(7079.56,2341.87) ; v1@7041.04,3130 v1(7045,3130) J12.3@7125,3130 ; J8.3@7285,1085 7285,1149.53 v1(7285.47,1150) ; J4.3@7605,3845 v1(7655.85,3845) ; J6.3@7679.12,1985 7679.12,2044.12 v1(7680,2045) ; J2.3@8895,4870 v1(8945,4870)
  Component Side w20: v1(2642.31,1640) v1(2915,1640)
  Bottom Layer w10: v1(2642.31,1640) v1@2645,1640 ; v1@6940,2130 ccw(c6943.81,2133.81) v1(6943.81,2128.42) ; v1@6945,2045 cw(c6946.38,2043.62) v1(6946.38,2045.57)
A1: Hat1.1 IC1.25 | length 1507.1
  Component Side w10: Hat1.1@2110.89,3053.29 2245.08,2919.1 ccw(c2315.79,2989.81) 2315.79,2889.81 2362.61,2889.81 cw(c2362.61,2789.81) 2433.32,2860.52 v1(2440.71,2853.13) ; v1(2470,2533.18) v1(2830,2533.18) ; IC1.25@2934.06,2258.19 ccw(c2941.75,2265.88) 2941.75,2255 v1(3002.88,2255)
  Bottom Layer w10: v1(2440.71,2853.13) cw(c2370,2782.42) 2470,2782.42 v1(2470,2533.18) ; v1(2830,2533.18) 2830,2469.3 ccw(c2930,2469.3) 2859.29,2398.59 v1(3002.88,2255)
A2: Hat2.1 IC2.25 | length 914.7
  Component Side w10: IC2.25@6784.06,2195 6819.64,2195 ccw(c6819.64,2280.36) 6880,2220 6891.25,2231.25 ccw(c6870.12,2252.38) 6900,2252.38 cw(c6944.21,2252.38) 6912.95,2283.64 6982.74,2353.43 cw(c6996.23,2339.95) 6996.23,2359.02 ccw(c6996.23,2371.89) 7005.33,2362.79 7199.51,2556.97 cw(c7245,2511.49) 7245,2575.81 7410.13,2575.81 ccw(c7410.13,2607.18) 7432.31,2585 cw(c7454.54,2562.77) 7454.54,2594.21 Hat2.1@7529.12,2594.21
ADR1_0: ADR1_0.2 R49.1 | length 389.9
  Component Side w10: ADR1_0.2@3165,2080.63 ccw(c3253.27,2080.63) 3190.85,2018.21 3236.57,1972.5 cw(c3228.28,1964.21) 3240,1964.21 3240,1798.02 cw(c3220.75,1798.02) 3234.36,1784.41 cw(c3175.43,1843.34) R49.1@3175.43,1760
ADR1_1: ADR1_1.2 R47.1 | length 433.7
  Component Side w10: v1(3150,2009.25) 3150,2008.87 cw(c3150,2006.14) 3151.93,2008.07 3190.71,1969.29 cw(c3120,1898.58) 3220,1898.58 3220,1849.41 cw(c3209.35,1849.41) 3216.88,1841.88 3210,1835 cw(c3185.86,1859.14) 3185.86,1825 R47.1@3175.43,1825 ; v1(3165,2145.58) ADR1_1.2@3165,2198.51
  Bottom Layer w10: v1(3150,2009.25) 3150,2109.37 cw(c3193.32,2109.37) 3162.69,2140 ccw(c3157.11,2145.58) v1(3165,2145.58)
ADR1_2: ADR1_2.2 R45.1 | length 465.1
  Component Side w10: v1(3114.28,2015) ccw(c3124.63,2015) 3117.31,2007.69 3155.72,1969.28 cw(c3108.11,1921.68) 3175.43,1921.68 R45.1@3175.43,1890 ; v1(3165,2260) ADR1_2.2@3165,2316.4
  Bottom Layer w10: v1(3114.28,2015) 3114.28,2167.86 cw(c3214.28,2167.86) 3143.57,2238.57 v1(3165,2260)
ADR2_0: ADR2_0.2 R50.1 | length 390.9
  Component Side w10: R50.1@7025.43,1695 v1(7060.94,1695) ; ADR2_0.2@7045,2045 7045,1932.98 ccw(c7099.41,1932.98) 7060.94,1894.51 cw(c7059.52,1894.51) v1(7060.52,1893.5)
  Bottom Layer w10: v1(7060.52,1893.5) ccw(c7061.78,1892.24) 7060,1892.24 7060,1695 v1(7060.94,1695)
ADR2_1: ADR2_1.2 R48.1 | length 530
  Component Side w10: R48.1@7025.43,1765 7060.94,1765 ccw(c7060.94,1782.07) 7073.01,1770 7079.55,1776.54 ccw(c7066.4,1789.7) 7085,1789.7 7085,1907.93 cw(c7102.07,1907.93) 7090,1920 7118.97,1948.97 ccw(c7082.95,1985) 7133.9,1985 7133.9,2078.79 ccw(c7110.97,2078.79) 7127.18,2095 7124.68,2097.5 ccw(c7110,2082.83) 7110,2103.58 7069.56,2103.58 cw(c7069.56,2125.49) 7054.07,2110 cw(c7075.97,2131.9) 7045,2131.9 ADR2_1.2@7045,2162.88
ADR2_2: ADR2_2.2 R46.1 | length 610
  Component Side w10: R46.1@7025.43,1835 7025.43,1902.53 ccw(c6955.67,1902.53) 7005,1951.87 6998.09,1958.78 ccw(c6970,1930.69) 6970,1970.41 6956.07,1970.41 cw(c6956.07,1986.07) 6945,1975 6939.29,1980.71 cw(c7010,2051.42) 6910,2051.42 6910,2174.44 cw(c6960.29,2174.44) 6924.73,2210 cw(c6951.4,2183.33) 6951.4,2221.05 7016.52,2221.05 ccw(c7016.52,2251.61) 7038.13,2230 ccw(c7021.56,2246.58) 7045,2246.58 ADR2_2.2@7045,2280.77
An0: extDisp.3 Out3.3 | length 1293.9
  Component Side w10: extDisp.3@5355,3455 5355,3410.36 ccw(c5376.72,3410.36) 5361.36,3395 ccw(c5371.72,3405.36) 5371.72,3390.71 5533.28,3390.71 cw(c5533.28,3388.28) v1(5535,3390) ; Out3.3@5370,2500 v1(5536.1,2500)
  Bottom Layer w10: v1(5535,3390) 5536.1,3390 v1(5536.1,2500)
An1: extDisp.4 Out3.4 | length 1295.5
  Component Side w10: Out3.4@5370,2600 v1(5500,2600)
  Bottom Layer w10: extDisp.4@5355,3555 5389.26,3589.26 cw(c5459.97,3518.55) 5459.97,3618.55 ; 5460,3618.55 cw(c5460,3588.14) 5481.5,3609.64 5481.73,3609.41 cw(c5437.63,3565.31) 5500,3565.31 v1(5500,2600)
An2: extDisp.5 Out3.5 | length 859
  Component Side w10: Out3.5@5370,2700 v1(5470,2700)
  Bottom Layer w10: extDisp.5@5455,3455 cw(c5418.79,3418.79) 5470,3418.79 v1(5470,2700)
An3: extDisp.6 Out3.6 | length 850.8
  Component Side w10: Out3.6@5370,2800 v1(5440,2800)
  Bottom Layer w10: v1(5440,2800) 5440,3340.39 ccw(c5340,3340.39) 5410.71,3411.1 cw(c5424.5,3424.89) 5405,3424.89 5405,3463.58 cw(c5505,3463.58) 5434.29,3534.29 extDisp.6@5455,3555
B1: Hat1.3 IC1.26 | length 1499.8
  Component Side w10: v1(2330,2570) v1(2870,2570) ; IC1.26@2934.06,2308.19 v1(3004.56,2308.19)
  Bottom Layer w10: Hat1.3@2110.89,2953.29 2089.29,2931.7 ccw(c2160,2860.98) 2060,2860.98 2060,2741.59 ccw(c2104.67,2741.59) 2073.08,2710 ccw(c2085.16,2722.07) 2085.16,2705 2117.47,2705 cw(c2117.47,2605) 2188.18,2675.71 2268.36,2595.53 ccw(c2330,2657.18) v1(2330,2570) ; v1(2870,2570) 2870,2480.98 ccw(c2970,2480.98) 2899.29,2410.27 3004.56,2305 v1(3004.56,2308.19)
B2: Hat2.3 IC2.26 | length 913.9
  Component Side w10: IC2.26@6784.06,2245 6804,2245 ccw(c6804,2345) 6874.71,2274.29 7176.24,2575.81 cw(c7246.95,2505.1) 7246.95,2605.1 7335.6,2605.1 ccw(c7335.6,2705.1) 7406.31,2634.39 7436.84,2664.92 cw(c7507.55,2594.21) 7507.55,2694.21 Hat2.3@7529.12,2694.21
BTLED: J1.1 J2.1 J3.1 J4.1 J5.1 J6.1 J7.1 J8.1 LEDSwitch.2 | length 19080.7
  Component Side w10: v1(697.76,4578.38) 1129.83,4578.38 cw(c1129.83,4494.98) 1188.8,4553.95 1868.46,3874.29 ccw(c1939.17,3945) 1939.17,3845 J3.1@2010,3845 2010,3888.79 cw(c2018.79,3888.79) 2012.57,3895 cw(c2019.87,3887.7) 2019.87,3898.02 2195.56,3898.02 cw(c2195.56,3798.02) 2266.27,3868.73 2445.79,3689.21 ccw(c2516.5,3759.92) 2516.5,3659.92 4126.29,3659.92 ccw(c4126.29,3711.4) 4162.69,3675 4163.63,3675.94 cw(c4197.58,3641.99) 4197.58,3690 4235.67,3690 cw(c4235.67,3604.64) 4296.03,3665 4330.74,3630.29 cw(c4320.44,3620) LEDSwitch.2@4335,3620 4427.49,3620 cw(c4427.49,3537.66) 4485.71,3595.88 cw(c4415,3525.17) 4515,3525.17 4515,3461.42 ccw(c4615,3461.42) 4544.29,3390.71 4650.71,3284.29 ccw(c4721.42,3355) 4721.42,3255 4917.05,3255 ccw(c4917.05,3355) 4987.76,3284.29 5100.71,3397.24 ccw(c5030,3467.95) 5130,3467.95 5130,3542.5 cw(c5230,3542.5) 5159.29,3613.21 5201.79,3655.71 cw(c5272.5,3585) 5272.5,3685 7126.3,3685 ccw(c7126.3,3785) 7197.01,3714.29 7362.72,3880 ; v1(697.76,4930) J1.1@745,4930 ; J5.1@1960,1970 ccw(c1947.93,1982.07) 1965,1982.07 1965,2016.94 ccw(c1959.02,2016.94) 1963.25,2021.17 1960,2024.42 ccw(c1946.53,2010.94) 1946.53,2030 1931.96,2030 ; J7.1@2355,1130 2355,1193.53 ccw(c2255,1193.53) 2325.71,1264.24 1954.24,1635.71 ccw(c1883.53,1565) 1883.53,1665 1616.25,1665 cw(c1616.25,1765) 1545.54,1694.29 cw(c1583.06,1731.81) 1530,1731.81 1530,1954.12 cw(c1616.1,1954.12) 1555.22,2015 cw(c1591.43,1978.79) 1591.43,2030 1931.96,2030 ; v1(2755,3415) 2051.42,3415 ccw(c2051.42,3315) 1980.71,3385.71 1971.37,3376.37 ccw(c2042.08,3305.66) 1942.08,3305.66 1942.08,2668.65 cw(c1925.71,2668.65) 1937.28,2657.08 ccw(c1950.14,2644.22) 1931.96,2644.22 1931.96,2030 ; J8.1@7185,1085 7185,1156.45 cw(c7285,1156.45) 7214.29,1227.16 7597.84,1610.71 cw(c7668.55,1540) 7668.55,1640 8003.58,1640 ccw(c8003.58,1740) 8074.29,1669.29 8075.71,1670.71 ccw(c8005,1741.42) 8105,1741.42 8105,1959.82 ccw(c8005,1959.82) 8075.71,2030.53 ccw(c8040.77,1995.59) 8040.77,2045 7780.06,2045 cw(c7780.06,2145) 7709.35,2074.29 ccw(c7691.2,2056.13) 7691.2,2081.81 7647.13,2081.81 ; J6.1@7579.12,1985 7579.12,2047.07 cw(c7590.33,2047.07) 7582.4,2055 cw(c7647.13,1990.27) 7647.13,2081.81 ; J2.1@8795,4870 8767.8,4870 ccw(c8767.8,4808.74) 8724.48,4852.06 8156.71,4284.29 cw(c8086,4355) 8086,4255 7779.14,4255 ccw(c7779.14,4155) 7708.43,4225.71 7362.72,3880 ; 7362.72,3880 7368.43,3874.29 ccw(c7439.14,3945) 7439.14,3845 J4.1@7505,3845 7505,3883.8 cw(c7539.14,3883.8) 7515,3907.94 cw(c7546.58,3876.36) 7546.58,3921.02 7943.76,3921.02 cw(c7943.76,3821.02) 8014.48,3891.73 8040.71,3865.49 cw(c7970,3794.78) 8070,3794.78 8070,3631.42 cw(c7970,3631.42) 8040.71,3560.71 7719.29,3239.29 ccw(c7790,3168.58) 7690,3168.58 7690,2786.03 ccw(c7721.67,2786.03) 7699.28,2763.64 7699.92,2763 cw(c7677.53,2740.61) 7709.19,2740.61 7709.19,2286.47 cw(c7609.19,2286.47) 7679.9,2215.76 7675,2210.86 ccw(c7742.29,2143.58) 7647.13,2143.58 7647.13,2081.81
  Bottom Layer w10: v1(697.76,4578.38) v1(697.76,4930) ; v1(2755,3415) 2755,3659.93 v1(2755.07,3660)
C1: Hat1.5 IC1.27 | length 1389.1
  Component Side w10: Hat1.5@2110.89,2853.29 2072.31,2814.71 ccw(c2102.02,2785) 2060,2785 2060,2741.21 ccw(c2111.21,2741.21) 2075,2705 2116.66,2705 cw(c2116.66,2605) 2187.37,2675.71 2228.79,2634.29 ccw(c2299.5,2705) 2299.5,2605 v1(2905,2605) ; IC1.27@2934.06,2358.19 3004.56,2358.19 cw(c3004.56,2360.56) v1(3002.88,2358.88)
  Bottom Layer w10: v1(2905,2605) 2905,2498.19 ccw(c3005,2498.19) 2934.29,2427.48 v1(3002.88,2358.88)
C2: Hat2.5 IC2.27 | length 1264.8
  Component Side w10: IC2.27@6784.06,2295 6815.48,2295 ccw(c6815.48,2395) 6886.19,2324.29 v1(7130,2568.1) ; v1(7130,2920.55) 7383.02,2920.55 cw(c7383.02,2820.55) 7453.73,2891.27 7513.79,2831.21 cw(c7476.79,2794.21) Hat2.5@7529.12,2794.21
  Bottom Layer w10: v1(7130,2568.1) v1(7130,2920.55)
Clutch1: Clutch1.2 Out3.8 | length 4983
  Component Side w10: v1(2910,1195) v1(3335,1195) ; v1(3335,2551.13) 3335,3011.25 cw(c3435,3011.25) 3364.29,3081.96 3404.46,3122.13 cw(c3475.17,3051.42) 3475.17,3151.42 5361.36,3151.42 ccw(c5361.36,3163.64) 5370,3155 v1(5370,3150)
  Bottom Layer w10: Clutch1.2@2850,735 2850,785.31 cw(c2950,785.31) 2879.29,856.02 2886.48,863.21 ccw(c2829.68,920) 2910,920 v1(2910,1195) ; v1(3335,1195) v1(3335,2551.13) ; Out3.8@5370,3000 v1(5370,3150)
Clutch2: Clutch2.2 Out3.7 | length 2346.6
  Component Side w10: Out3.7@5370,2900 v1(5575,2900) ; Clutch2.2@5652.12,837.99 5690.71,876.59 ccw(c5620,947.3) 5720,947.3 v1(5720,956.61)
  Bottom Layer w10: v1(5575,2900) ccw(c5620.8,2854.2) 5556.03,2854.2 5556.03,2726.41 ccw(c5569.59,2726.41) 5560,2716.82 cw(c5546.59,2703.41) 5565.56,2703.41 5565.56,2299.26 ccw(c5633.03,2299.26) 5585.32,2251.55 5590.71,2246.16 cw(c5520,2175.45) 5620,2175.45 5620,1432.44 ccw(c5720,1432.44) 5649.29,1361.73 5690.71,1320.31 cw(c5620,1249.6) 5720,1249.6 v1(5720,956.61)
D1: Hat1.7 IC1.28 | length 1195.1
  Component Side w10: Hat1.7@2110.89,2753.29 2136.73,2753.29 cw(c2136.73,2653.29) 2207.44,2724 2267.15,2664.29 ccw(c2337.86,2735) 2337.86,2635 v1(2933.53,2635) ; IC1.28@2934.06,2408.19 3010,2408.19 cw(c3010,2415.88) v1(3004.56,2410.44)
  Bottom Layer w10: v1(2933.53,2635) cw(c2933.53,2632.92) 2935,2634.39 2935,2521.42 ccw(c3035,2521.42) 2964.29,2450.71 v1(3004.56,2410.44)
D2: Hat2.7 IC2.28 | length 1230.1
  Component Side w10: IC2.28@6784.06,2345 6831.58,2345 ccw(c6831.58,2359.65) 6841.93,2349.28 7091.33,2598.67 7092.18,2599.53 cw(c7093.31,2598.4) 7093.31,2600 v1(7090,2600) ; v1(7090,2953.29) 7428.61,2953.29 cw(c7428.61,2853.29) 7499.32,2924 Hat2.7@7529.12,2894.21
  Bottom Layer w10: v1(7090,2600) v1(7090,2953.29)
Di0: Out2.8 RxTx.2 | length 507.6
  Bottom Layer w10: Out2.8@4270,3000 4270,3378.58 cw(c4370,3378.58) 4299.29,3449.29 RxTx.2@4335,3485
Di1: Out2.7 RxTx.1 | length 610.7
  Bottom Layer w10: RxTx.1@4235,3485 4235,3232.43 ccw(c4266.72,3232.43) 4244.29,3210 cw(c4242.57,3208.28) 4245,3208.28 cw(c4227.47,3190.75) 4252.26,3190.75 4252.26,3076.69 cw(c4219.18,3076.69) 4242.57,3053.29 ccw(c4283.23,3012.64) 4225.73,3012.64 4225.73,2985.69 ccw(c4325.73,2985.69) 4255.02,2914.98 Out2.7@4270,2900
EncA1: Hat1.2 J10.1 Out2.4 | length 3050.7
  Component Side w10: Hat1.2@2010.89,3053.29 2010.89,3118.41 cw(c2036.34,3118.41) 2018.34,3136.41 2117.64,3235.71 cw(c2188.35,3165) 2188.35,3265 v1(4150,3265) ; v1(4150,2668.12) J10.1@4150,2600 Out2.4@4270,2600
  Bottom Layer w10: v1(4150,2668.12) v1(4150,3265)
EncA2: Hat2.2 J13.1 Out2.2 | length 4496.7
  Component Side w10: J13.1@4150,2400 Out2.2@4270,2400 5246.85,2400 ccw(c5246.85,2500) 5317.56,2429.29 cw(c5355.49,2391.36) 5355.49,2445 5419.05,2445 cw(c5419.05,2345) 5489.76,2415.71 5496.18,2409.29 ccw(c5566.89,2480) 5566.89,2380 v1(5665,2380) ; v1(7045.47,2910) 7064.36,2910 cw(c7064.36,2870.65) 7092.18,2898.48 ccw(c7100.57,2906.87) 7100.57,2895 7146.61,2895 ccw(c7146.61,2906.87) 7155,2898.48 cw(c7164.99,2888.49) 7164.99,2902.61 7316.46,2902.61 cw(c7316.46,2802.61) 7387.17,2873.32 v1(7445,2815.49)
  Bottom Layer w10: v1(5665,2380) 5665,2968.58 cw(c5765,2968.58) 5694.29,3039.29 5805.71,3150.71 cw(c5876.42,3080) 5876.42,3180 6528.58,3180 cw(c6528.58,3080) 6599.29,3150.71 6817.7,2932.3 ccw(c6888.41,3003.01) 6888.41,2903.01 7028.59,2903.01 ccw(c7028.59,2926.88) v1(7045.47,2910) ; v1(7445,2815.49) 7445,2805.56 ccw(c7461.31,2805.56) 7449.78,2794.03 cw(c7393.9,2738.16) 7472.92,2738.16 7472.92,2686.48 ccw(c7514.16,2686.48) 7485,2657.31 ccw(c7502.65,2674.97) 7502.65,2650 7531.9,2650 cw(c7531.9,2550) 7602.61,2620.71 Hat2.2@7629.12,2594.21
EncB1: Hat1.4 J11.1 Out2.3 | length 3141.6
  Component Side w10: Hat1.4@2010.89,2953.29 2038.19,2980.59 ccw(c1993.78,3025) 2056.58,3025 2056.58,3055.16 cw(c2156.58,3055.16) 2085.87,3125.87 2180.49,3220.49 cw(c2215.52,3185.45) 2215.52,3235 v1(4125,3235) ; v1(4150,2500) Out2.3@4270,2500
  Bottom Layer w10: v1(4125,3235) 4125,2550 ccw(c4185.36,2550) 4142.68,2507.32 v1(4150,2500)